# Altium PCB ISC.PcbDoc (part 1 of 3)
Units mm, origin at the board's own origin, x right, y up, seen from the top; angles counter-clockwise.
Board outline 152.4 x 101.6 mm, 2 copper layers (Top Layer, Bottom Layer); 689 components, 715 nets, 2378 pads, 0 vias.
Unrouted connection lines stored in the file: 1379.
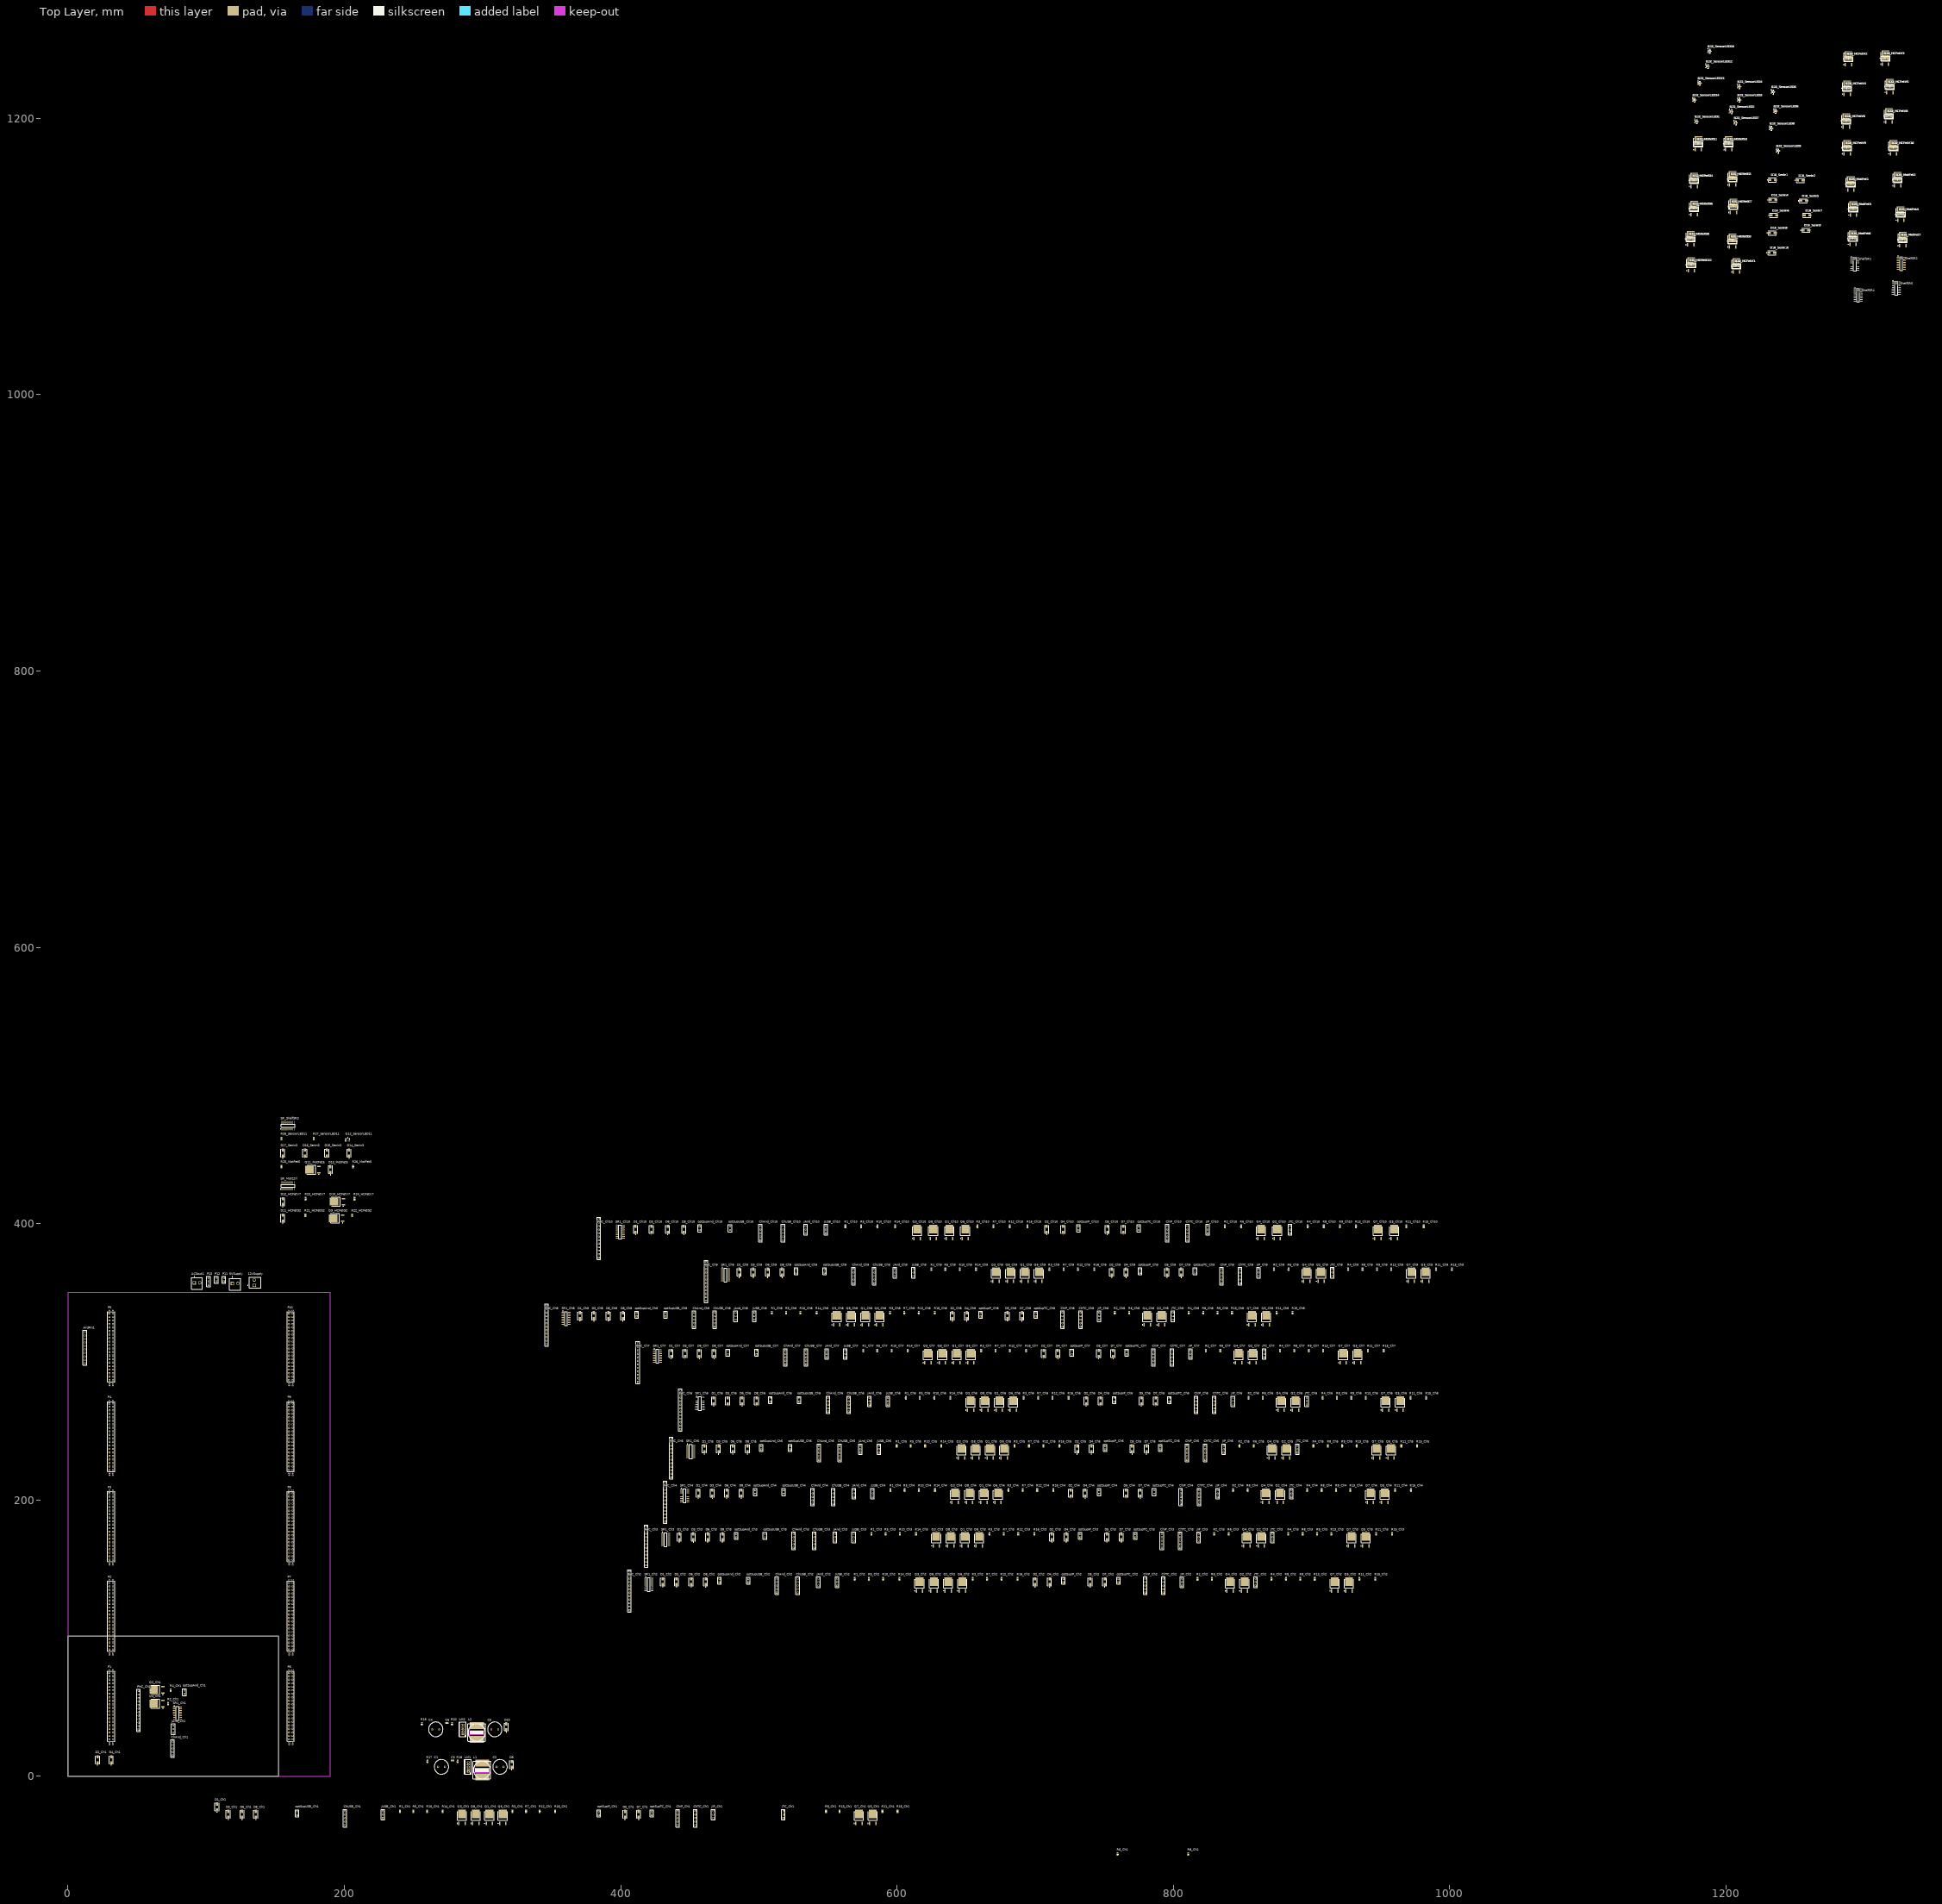
[diagram p0: Top Layer view]
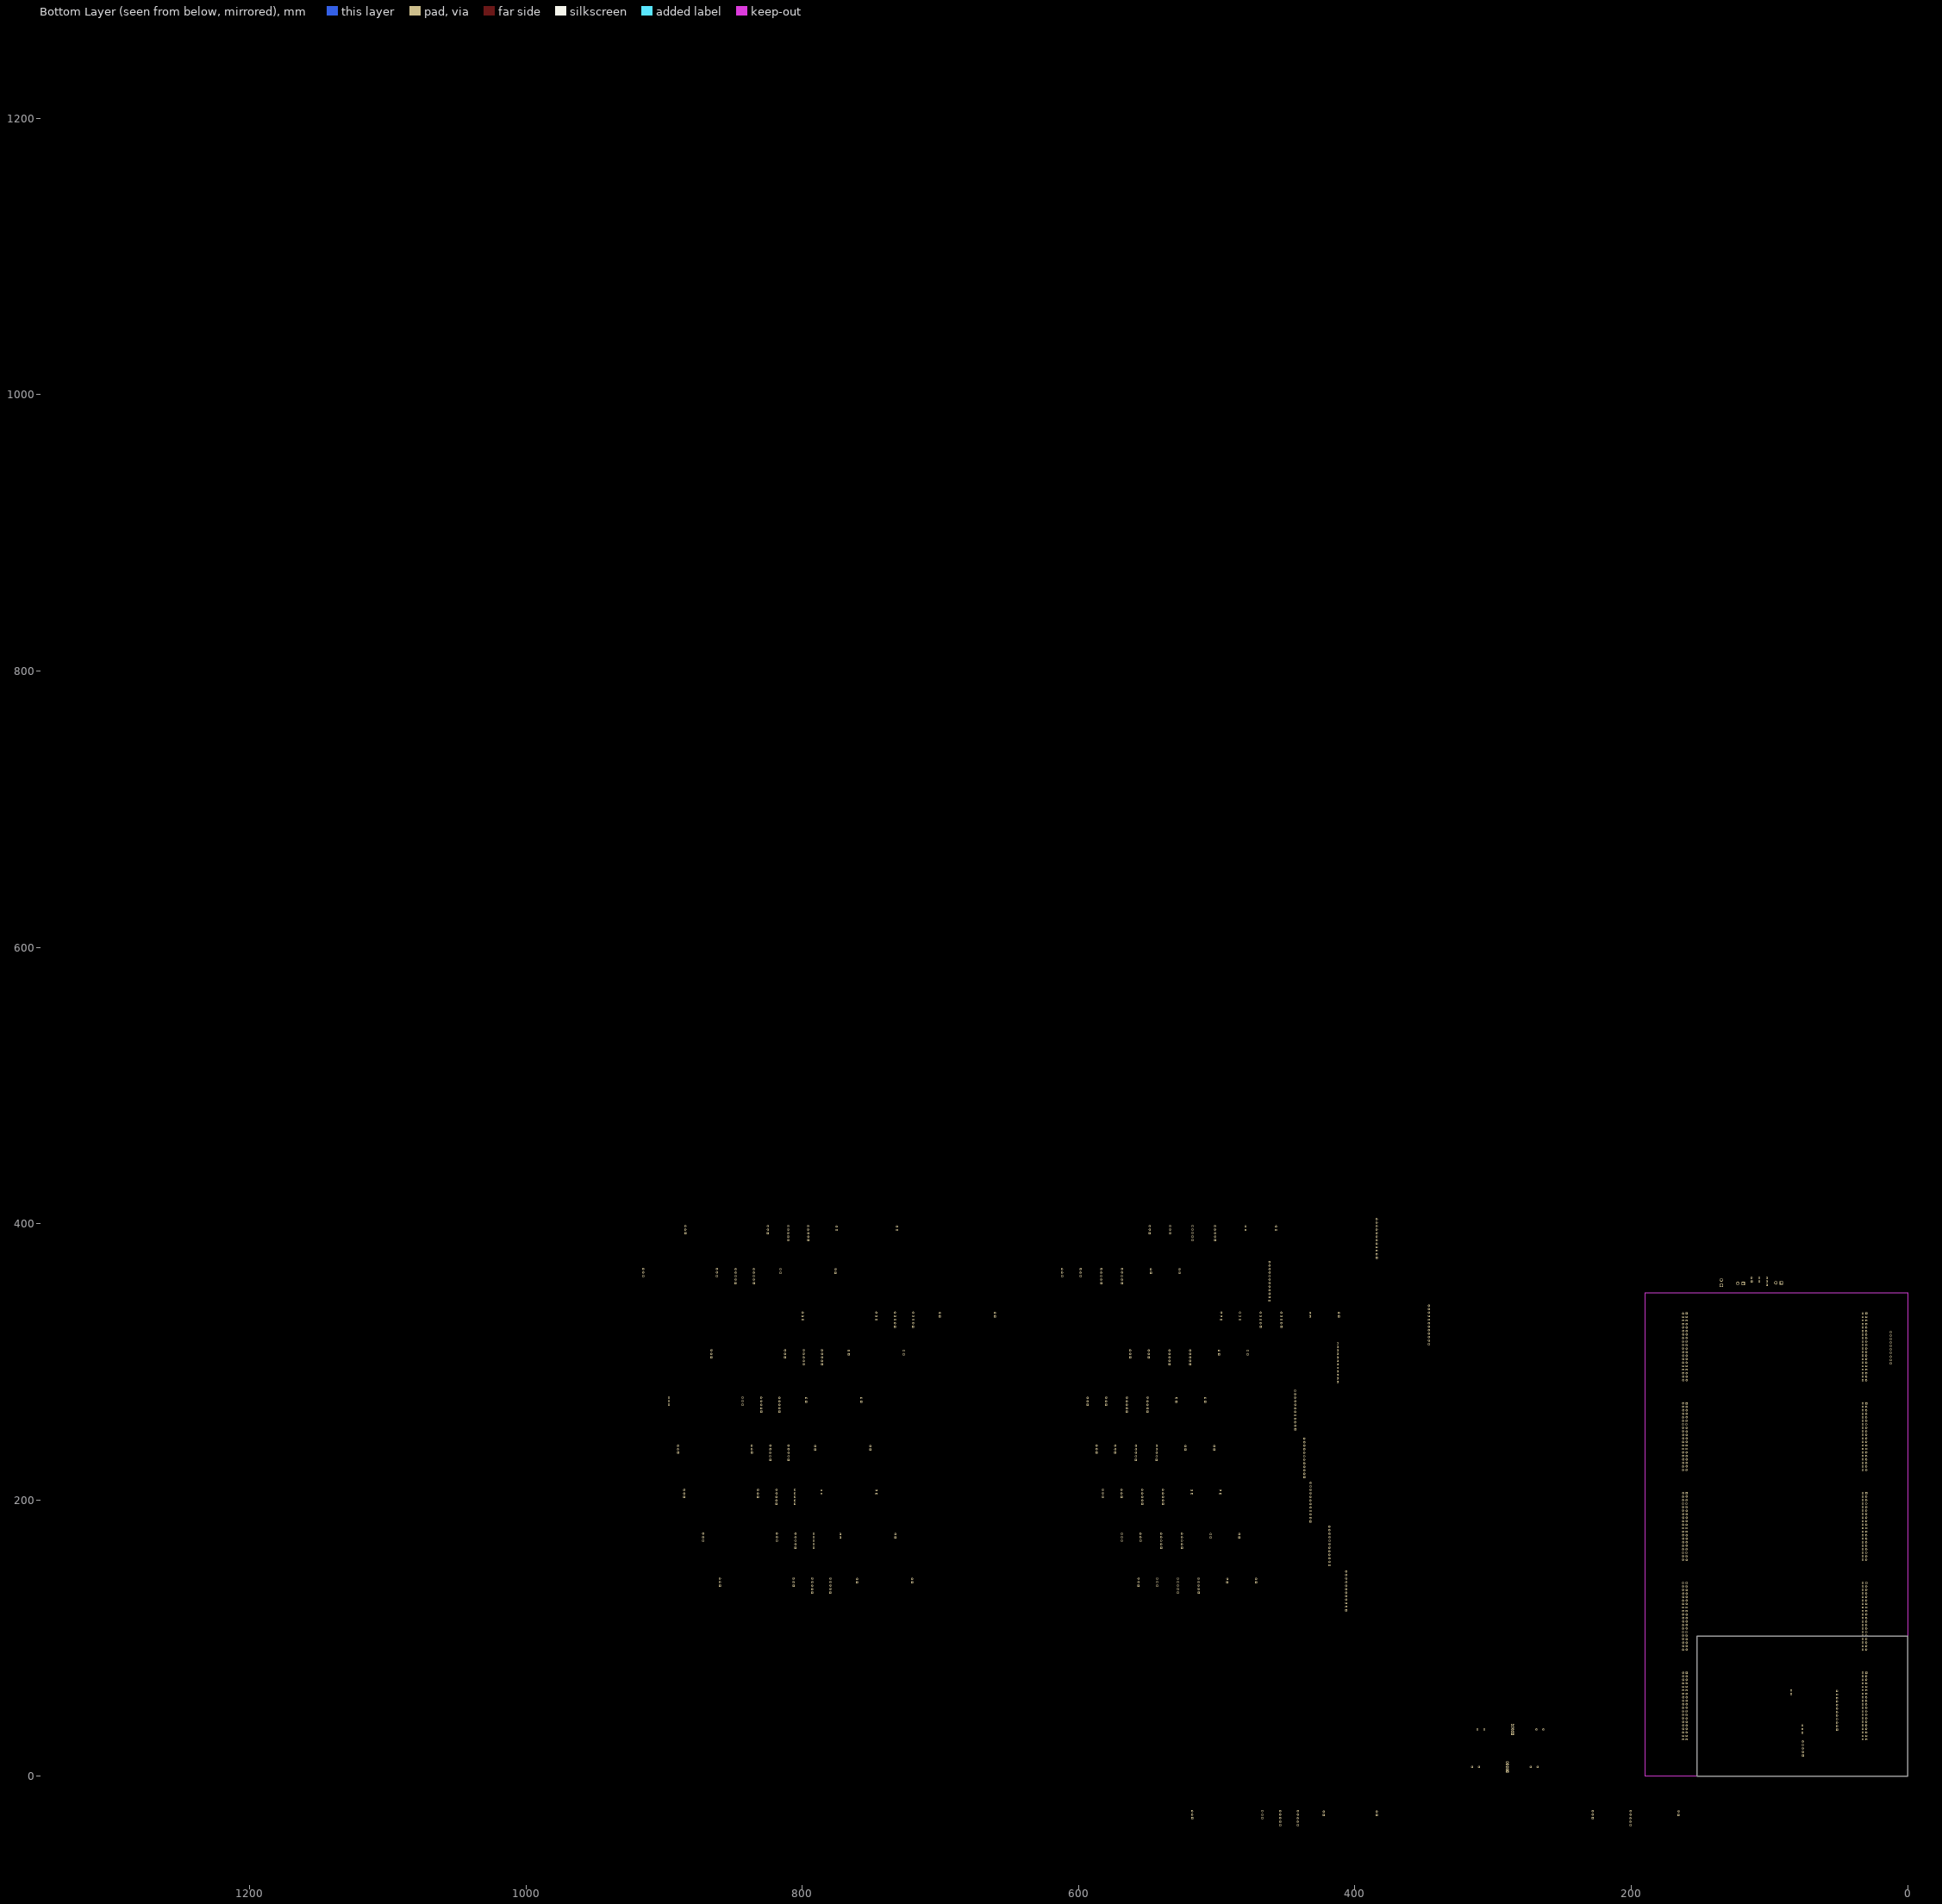
[diagram p1: Bottom Layer view, seen from below]

## Layer stack, top to bottom
Top Solder: solder mask 0.0102, Solder Resist, Dk 3.5
Top Layer: signal copper 0.0356
Dielectric 1: dielectric 0.32, FR-4, Dk 4.8
Bottom Layer: signal copper 0.0356
Bottom Solder: solder mask 0.0102, Solder Resist, Dk 3.5

## Board outline
0,0 152.4,0 152.4,101.6 0,101.6
cut-out: 0,0 190,0 190,350 0,350

## Design rules (kind name [scope] priority, off if disabled: settings)
Clearance [All] p1: gap=0.254 ignorepadtopadclearanceinfootprint=FALSE except(0: Arc-Hole Track-Hole SMDPad-Hole THPad-Hole Via-Hole Fill-Hole Poly-Hole Region-Hole Text-Hole)
PolygonConnect [All] p1: connectstyle=Relief reliefconductorwidth=0.254 reliefentries=4 polygonreliefangle="90 Angle" airgapwidth=0.254
RoomDefinition ShelfSR5 [InComponentClass('ShelfSR5')] p1: confinementstyle=ConfineIn formatcopy=TRUE lockcomponents=FALSE outline 1319.53,1071.753 1338.326,1071.753 1338.326,1082.802 1319.53,1082.802
RoomDefinition ShelfSR4 [InComponentClass('ShelfSR4')] p2: confinementstyle=ConfineIn formatcopy=TRUE lockcomponents=FALSE outline 1291.971,1066.8 1310.767,1066.8 1310.767,1077.849 1291.971,1077.849
RoomDefinition ShelfSR3 [InComponentClass('ShelfSR3')] p3: confinementstyle=ConfineIn formatcopy=TRUE lockcomponents=FALSE outline 153.543,467.233 170.18,467.233 170.18,477.393 153.543,477.393
RoomDefinition ShelfSR2 [InComponentClass('ShelfSR2')] p4: confinementstyle=ConfineIn formatcopy=TRUE lockcomponents=FALSE outline 1323.162,1089.673 1341.958,1089.673 1341.958,1100.722 1323.162,1100.722
RoomDefinition ShelfSR1 [InComponentClass('ShelfSR1')] p5: confinementstyle=ConfineIn formatcopy=TRUE lockcomponents=FALSE outline 1289.558,1089.279 1307.846,1089.279 1307.846,1100.328 1289.558,1100.328
RoomDefinition SensorLED14 [InComponentClass('SensorLED14')] p6: confinementstyle=ConfineIn formatcopy=TRUE lockcomponents=FALSE outline 1174.877,1211.199 1198.499,1211.199 1198.499,1217.803 1174.877,1217.803
RoomDefinition SensorLED13 [InComponentClass('SensorLED13')] p7: confinementstyle=ConfineIn formatcopy=TRUE lockcomponents=FALSE outline 1178.687,1223.391 1202.309,1223.391 1202.309,1229.995 1178.687,1229.995
RoomDefinition SensorLED12 [InComponentClass('SensorLED12')] p8: confinementstyle=ConfineIn formatcopy=TRUE lockcomponents=FALSE outline 1184.402,1235.583 1208.024,1235.583 1208.024,1242.187 1184.402,1242.187
RoomDefinition SensorLED11 [InComponentClass('SensorLED11')] p9: confinementstyle=ConfineIn formatcopy=TRUE lockcomponents=FALSE outline 153.543,458.978 222.504,458.978 222.504,466.09 153.543,466.09
RoomDefinition SensorLED10 [InComponentClass('SensorLED10')] p10: confinementstyle=ConfineIn formatcopy=TRUE lockcomponents=FALSE outline 1185.799,1246.632 1209.421,1246.632 1209.421,1253.236 1185.799,1253.236
RoomDefinition SensorLED9 [InComponentClass('SensorLED9')] p11: confinementstyle=ConfineIn formatcopy=TRUE lockcomponents=FALSE outline 1235.456,1174.369 1257.808,1174.369 1257.808,1180.973 1235.456,1180.973
RoomDefinition SensorLED8 [InComponentClass('SensorLED8')] p12: confinementstyle=ConfineIn formatcopy=TRUE lockcomponents=FALSE outline 1230.503,1190.752 1252.855,1190.752 1252.855,1197.356 1230.503,1197.356
RoomDefinition SensorLED7 [InComponentClass('SensorLED7')] p13: confinementstyle=ConfineIn formatcopy=TRUE lockcomponents=FALSE outline 1204.722,1194.689 1227.074,1194.689 1227.074,1201.293 1204.722,1201.293
RoomDefinition SensorLED6 [InComponentClass('SensorLED6')] p14: confinementstyle=ConfineIn formatcopy=TRUE lockcomponents=FALSE outline 1233.551,1203.198 1255.903,1203.198 1255.903,1209.802 1233.551,1209.802
RoomDefinition SensorLED5 [InComponentClass('SensorLED5')] p15: confinementstyle=ConfineIn formatcopy=TRUE lockcomponents=FALSE outline 1231.773,1217.041 1254.125,1217.041 1254.125,1223.645 1231.773,1223.645
RoomDefinition SensorLED4 [InComponentClass('SensorLED4')] p16: confinementstyle=ConfineIn formatcopy=TRUE lockcomponents=FALSE outline 1207.262,1220.978 1229.614,1220.978 1229.614,1227.582 1207.262,1227.582
RoomDefinition SensorLED3 [InComponentClass('SensorLED3')] p17: confinementstyle=ConfineIn formatcopy=TRUE lockcomponents=FALSE outline 1207.262,1211.326 1229.614,1211.326 1229.614,1217.93 1207.262,1217.93
RoomDefinition SensorLED2 [InComponentClass('SensorLED2')] p18: confinementstyle=ConfineIn formatcopy=TRUE lockcomponents=FALSE outline 1201.547,1202.944 1223.899,1202.944 1223.899,1209.548 1201.547,1209.548
RoomDefinition SensorLED1 [InComponentClass('SensorLED1')] p19: confinementstyle=ConfineIn formatcopy=TRUE lockcomponents=FALSE outline 1176.401,1195.705 1198.245,1195.705 1198.245,1202.309 1176.401,1202.309
RoomDefinition SenIn10 [InComponentClass('SenIn10')] p20: confinementstyle=ConfineIn formatcopy=TRUE lockcomponents=FALSE outline 1228.979,1100.836 1248.029,1100.836 1248.029,1107.313 1228.979,1107.313
RoomDefinition SenIn9 [InComponentClass('SenIn9')] p21: confinementstyle=ConfineIn formatcopy=TRUE lockcomponents=FALSE outline 1253.617,1117.092 1271.397,1117.092 1271.397,1123.569 1253.617,1123.569
RoomDefinition SenIn8 [InComponentClass('SenIn8')] p22: confinementstyle=ConfineIn formatcopy=TRUE lockcomponents=FALSE outline 1229.233,1115.187 1247.013,1115.187 1247.013,1121.664 1229.233,1121.664
RoomDefinition SenIn7 [InComponentClass('SenIn7')] p23: confinementstyle=ConfineIn formatcopy=TRUE lockcomponents=FALSE outline 1254.379,1127.887 1272.159,1127.887 1272.159,1134.364 1254.379,1134.364
RoomDefinition SenIn6 [InComponentClass('SenIn6')] p24: confinementstyle=ConfineIn formatcopy=TRUE lockcomponents=FALSE outline 1230.376,1127.887 1248.156,1127.887 1248.156,1134.364 1230.376,1134.364
RoomDefinition SenIn5 [InComponentClass('SenIn5')] p25: confinementstyle=ConfineIn formatcopy=TRUE lockcomponents=FALSE outline 1251.966,1138.428 1269.746,1138.428 1269.746,1144.905 1251.966,1144.905
RoomDefinition SenIn4 [InComponentClass('SenIn4')] p26: confinementstyle=ConfineIn formatcopy=TRUE lockcomponents=FALSE outline 1229.741,1139.063 1247.521,1139.063 1247.521,1145.54 1229.741,1145.54
RoomDefinition SenIn3 [InComponentClass('SenIn3')] p27: confinementstyle=ConfineIn formatcopy=TRUE lockcomponents=FALSE outline 153.543,446.913 216.662,446.913 216.662,457.708 153.543,457.708
RoomDefinition SenIn2 [InComponentClass('SenIn2')] p28: confinementstyle=ConfineIn formatcopy=TRUE lockcomponents=FALSE outline 1249.553,1153.16 1267.333,1153.16 1267.333,1159.637 1249.553,1159.637
RoomDefinition SenIn1 [InComponentClass('SenIn1')] p29: confinementstyle=ConfineIn formatcopy=TRUE lockcomponents=FALSE outline 1229.487,1153.541 1246.759,1153.541 1246.759,1160.018 1229.487,1160.018
RoomDefinition MotFet7 [InComponentClass('MotFet7')] p30: confinementstyle=ConfineIn formatcopy=TRUE lockcomponents=FALSE outline 1323.721,1106.043 1343.025,1106.043 1343.025,1118.235 1323.721,1118.235
RoomDefinition MotFet6 [InComponentClass('MotFet6')] p31: confinementstyle=ConfineIn formatcopy=TRUE lockcomponents=FALSE outline 1287.653,1106.932 1306.957,1106.932 1306.957,1119.124 1287.653,1119.124
RoomDefinition MotFet5 [InComponentClass('MotFet5')] p32: confinementstyle=ConfineIn formatcopy=TRUE lockcomponents=FALSE outline 153.543,434.975 221.996,434.975 221.996,445.77 153.543,445.77
RoomDefinition MotFet4 [InComponentClass('MotFet4')] p33: confinementstyle=ConfineIn formatcopy=TRUE lockcomponents=FALSE outline 1322.273,1124.471 1341.577,1124.471 1341.577,1136.663 1322.273,1136.663
RoomDefinition MotFet3 [InComponentClass('MotFet3')] p34: confinementstyle=ConfineIn formatcopy=TRUE lockcomponents=FALSE outline 1287.983,1128.281 1307.287,1128.281 1307.287,1140.473 1287.983,1140.473
RoomDefinition MotFet2 [InComponentClass('MotFet2')] p35: confinementstyle=ConfineIn formatcopy=TRUE lockcomponents=FALSE outline 1319.987,1149.49 1339.291,1149.49 1339.291,1161.682 1319.987,1161.682
RoomDefinition MotFet1 [InComponentClass('MotFet1')] p36: confinementstyle=ConfineIn formatcopy=TRUE lockcomponents=FALSE outline 1286.129,1146.429 1304.925,1146.429 1304.925,1158.621 1286.129,1158.621
RoomDefinition MotCtrl [InComponentClass('MotCtrl')] p37: confinementstyle=ConfineIn formatcopy=TRUE lockcomponents=FALSE outline 153.543,423.672 168.148,423.672 168.148,433.832 153.543,433.832
RoomDefinition ISC [InComponentClass('ISC')] p38: confinementstyle=ConfineIn formatcopy=TRUE lockcomponents=FALSE outline 12.4,348.1 143.337,348.1 143.337,364.824 12.4,364.824
RoomDefinition HCFetV10 [InComponentClass('HCFetV10')] p39: confinementstyle=ConfineIn formatcopy=TRUE lockcomponents=FALSE outline 1316.99,1172.591 1337.818,1172.591 1337.818,1184.783 1316.99,1184.783
RoomDefinition HCFetV9 [InComponentClass('HCFetV9')] p40: confinementstyle=ConfineIn formatcopy=TRUE lockcomponents=FALSE outline 1283.411,1172.604 1302.969,1172.604 1302.969,1184.796 1283.411,1184.796
RoomDefinition HCFetV8 [InComponentClass('HCFetV8')] p41: confinementstyle=ConfineIn formatcopy=TRUE lockcomponents=FALSE outline 1313.688,1195.578 1333.246,1195.578 1333.246,1207.77 1313.688,1207.77
RoomDefinition HCFetV7 [InComponentClass('HCFetV7')] p42: confinementstyle=ConfineIn formatcopy=TRUE lockcomponents=FALSE outline 153.543,411.734 223.266,411.734 223.266,422.529 153.543,422.529
RoomDefinition HCFetV6 [InComponentClass('HCFetV6')] p43: confinementstyle=ConfineIn formatcopy=TRUE lockcomponents=FALSE outline 1282.903,1192.035 1302.461,1192.035 1302.461,1204.227 1282.903,1204.227
RoomDefinition HCFetV5 [InComponentClass('HCFetV5')] p44: confinementstyle=ConfineIn formatcopy=TRUE lockcomponents=FALSE outline 1314.399,1216.927 1333.957,1216.927 1333.957,1229.119 1314.399,1229.119
RoomDefinition HCFetV4 [InComponentClass('HCFetV4')] p45: confinementstyle=ConfineIn formatcopy=TRUE lockcomponents=FALSE outline 1283.411,1215.657 1302.969,1215.657 1302.969,1227.849 1283.411,1227.849
RoomDefinition HCFetV3 [InComponentClass('HCFetV3')] p46: confinementstyle=ConfineIn formatcopy=TRUE lockcomponents=FALSE outline 1311.148,1237.361 1330.706,1237.361 1330.706,1249.553 1311.148,1249.553
RoomDefinition HCFetV2 [InComponentClass('HCFetV2')] p47: confinementstyle=ConfineIn formatcopy=TRUE lockcomponents=FALSE outline 1284.478,1236.98 1304.036,1236.98 1304.036,1249.172 1284.478,1249.172
RoomDefinition HCFetV1 [InComponentClass('HCFetV1')] p48: confinementstyle=ConfineIn formatcopy=TRUE lockcomponents=FALSE outline 1203.325,1086.993 1222.375,1086.993 1222.375,1099.185 1203.325,1099.185
RoomDefinition HCFetG10 [InComponentClass('HCFetG10')] p49: confinementstyle=ConfineIn formatcopy=TRUE lockcomponents=FALSE outline 1170.686,1087.882 1191.514,1087.882 1191.514,1100.074 1170.686,1100.074
RoomDefinition HCFetG9 [InComponentClass('HCFetG9')] p50: confinementstyle=ConfineIn formatcopy=TRUE lockcomponents=FALSE outline 1200.531,1105.027 1220.089,1105.027 1220.089,1117.219 1200.531,1117.219
RoomDefinition HCFetG8 [InComponentClass('HCFetG8')] p51: confinementstyle=ConfineIn formatcopy=TRUE lockcomponents=FALSE outline 1170.178,1106.678 1189.736,1106.678 1189.736,1118.87 1170.178,1118.87
RoomDefinition HCFetG7 [InComponentClass('HCFetG7')] p52: confinementstyle=ConfineIn formatcopy=TRUE lockcomponents=FALSE outline 1201.166,1130.046 1220.724,1130.046 1220.724,1142.238 1201.166,1142.238
RoomDefinition HCFetG6 [InComponentClass('HCFetG6')] p53: confinementstyle=ConfineIn formatcopy=TRUE lockcomponents=FALSE outline 1172.718,1128.649 1192.276,1128.649 1192.276,1140.841 1172.718,1140.841
RoomDefinition HCFetG5 [InComponentClass('HCFetG5')] p54: confinementstyle=ConfineIn formatcopy=TRUE lockcomponents=FALSE outline 1200.531,1149.985 1220.089,1149.985 1220.089,1162.177 1200.531,1162.177
RoomDefinition HCFetG4 [InComponentClass('HCFetG4')] p55: confinementstyle=ConfineIn formatcopy=TRUE lockcomponents=FALSE outline 1172.718,1148.969 1192.276,1148.969 1192.276,1161.161 1172.718,1161.161
RoomDefinition HCFetG3 [InComponentClass('HCFetG3')] p56: confinementstyle=ConfineIn formatcopy=TRUE lockcomponents=FALSE outline 1197.737,1175.512 1217.295,1175.512 1217.295,1187.704 1197.737,1187.704
RoomDefinition HCFetG2 [InComponentClass('HCFetG2')] p57: confinementstyle=ConfineIn formatcopy=TRUE lockcomponents=FALSE outline 153.543,399.796 221.488,399.796 221.488,410.591 153.543,410.591
RoomDefinition HCFetG1 [InComponentClass('HCFetG1')] p58: confinementstyle=ConfineIn formatcopy=TRUE lockcomponents=FALSE outline 1175.766,1175.512 1194.816,1175.512 1194.816,1187.704 1175.766,1187.704
RoomDefinition Ch10 [InComponentClass('Ch10')] p59: confinementstyle=ConfineIn formatcopy=TRUE lockcomponents=FALSE outline 382.803,373.842 992.276,373.842 992.276,402.544 382.803,402.544
RoomDefinition Ch9 [InComponentClass('Ch9')] p60: confinementstyle=ConfineIn formatcopy=TRUE lockcomponents=FALSE outline 460.269,342.776 1011.322,342.776 1011.322,371.478 460.269,371.478
RoomDefinition Ch8 [InComponentClass('Ch8')] p61: confinementstyle=ConfineIn formatcopy=TRUE lockcomponents=FALSE outline 344.934,311.243 895.987,311.243 895.987,339.945 344.934,339.945
RoomDefinition Ch7 [InComponentClass('Ch7')] p62: confinementstyle=ConfineIn formatcopy=TRUE lockcomponents=FALSE outline 410.948,283.943 962.001,283.943 962.001,312.645 410.948,312.645
RoomDefinition Ch6 [InComponentClass('Ch6')] p63: confinementstyle=ConfineIn formatcopy=TRUE lockcomponents=FALSE outline 441.748,249.643 992.801,249.643 992.801,278.345 441.748,278.345
RoomDefinition Ch5 [InComponentClass('Ch5')] p64: confinementstyle=ConfineIn formatcopy=TRUE lockcomponents=FALSE outline 435.151,214.928 986.204,214.928 986.204,243.63 435.151,243.63
RoomDefinition Ch4 [InComponentClass('Ch4')] p65: confinementstyle=ConfineIn formatcopy=TRUE lockcomponents=FALSE outline 430.648,182.943 981.701,182.943 981.701,211.645 430.648,211.645
RoomDefinition Ch3 [InComponentClass('Ch3')] p66: confinementstyle=ConfineIn formatcopy=TRUE lockcomponents=FALSE outline 416.948,151.243 968.001,151.243 968.001,179.945 416.948,179.945
RoomDefinition Ch2 [InComponentClass('Ch2')] p67: confinementstyle=ConfineIn formatcopy=TRUE lockcomponents=FALSE outline 404.834,118.743 955.887,118.743 955.887,147.445 404.834,147.445
RoomDefinition Ch1 [InComponentClass('Ch1')] p68: confinementstyle=ConfineIn formatcopy=TRUE lockcomponents=FALSE outline 81.853,-26.073 609.665,-26.073 609.665,2.629 81.853,2.629
RoomDefinition 3.3VReg [InComponentClass('3.3VReg')] p69: confinementstyle=ConfineIn formatcopy=TRUE lockcomponents=FALSE outline 255.056,23.876 320.08,23.876 320.08,42.164 255.056,42.164
RoomDefinition 2VReg [InComponentClass('2VReg')] p70: confinementstyle=ConfineIn formatcopy=TRUE lockcomponents=FALSE outline 259.12,-3.302 323.001,-3.302 323.001,14.986 259.12,14.986
RoutingVias [All] p1: holewidth=0.711 width=1.27 viastyle="Through Hole" minholewidth=0.711 minwidth=1.27 maxholewidth=0.711 maxwidth=1.27
SolderMaskExpansion [All] p1: expansion=0.102
Width [All] p1: maxlimit=0.254 minlimit=0.254 preferedwidth=0.254
30 further rules are at their usual default settings.

## Classes and differential pairs
channel class ShiftRegister: MotCtrl ShelfSR1 ShelfSR2 ShelfSR3 ShelfSR4 ShelfSR5
channel class SensorIn: SenIn1 SenIn2 SenIn3 SenIn4 SenIn5 SenIn6 SenIn7 SenIn8 SenIn9 SenIn10
channel class SenLEDFet: SensorLED1 SensorLED2 SensorLED3 SensorLED4 SensorLED5 SensorLED6 SensorLED7 SensorLED8 SensorLED9 SensorLED10 SensorLED11 SensorLED12 SensorLED13 SensorLED14
channel class MotorMosfet: MotFet1 MotFet2 MotFet3 MotFet4 MotFet5 MotFet6 MotFet7
channel class HighCurrentFetVcc: HCFetV1 HCFetV2 HCFetV3 HCFetV4 HCFetV5 HCFetV6 HCFetV7 HCFetV8 HCFetV9 HCFetV10
channel class HighCurrentFetGND: HCFetG1 HCFetG2 HCFetG3 HCFetG4 HCFetG5 HCFetG6 HCFetG7 HCFetG8 HCFetG9 HCFetG10
channel class ChargerControl: Ch1 Ch2 Ch3 Ch4 Ch5 Ch6 Ch7 Ch8 Ch9 Ch10
component class ShelfSR5: SR_ShelfSR5
component class ShelfSR4: SR_ShelfSR4
component class ShelfSR3: SR_ShelfSR3
component class ShelfSR2: SR_ShelfSR2
component class ShelfSR1: SR_ShelfSR1
component class SensorLED14: Q12_SensorLED14 R27_SensorLED14 R28_SensorLED14
component class SensorLED13: Q12_SensorLED13 R27_SensorLED13 R28_SensorLED13
component class SensorLED12: Q12_SensorLED12 R27_SensorLED12 R28_SensorLED12
component class SensorLED11: Q12_SensorLED11 R27_SensorLED11 R28_SensorLED11
component class SensorLED10: Q12_SensorLED10 R27_SensorLED10 R28_SensorLED10
component class SensorLED9: Q12_SensorLED9 R27_SensorLED9 R28_SensorLED9
component class SensorLED8: Q12_SensorLED8 R27_SensorLED8 R28_SensorLED8
component class SensorLED7: Q12_SensorLED7 R27_SensorLED7 R28_SensorLED7
component class SensorLED6: Q12_SensorLED6 R27_SensorLED6 R28_SensorLED6
component class SensorLED5: Q12_SensorLED5 R27_SensorLED5 R28_SensorLED5
component class SensorLED4: Q12_SensorLED4 R27_SensorLED4 R28_SensorLED4
component class SensorLED3: Q12_SensorLED3 R27_SensorLED3 R28_SensorLED3
component class SensorLED2: Q12_SensorLED2 R27_SensorLED2 R28_SensorLED2
component class SensorLED1: Q12_SensorLED1 R27_SensorLED1 R28_SensorLED1
component class SenIn10: D14_SenIn10 D15_SenIn10 D16_SenIn10 D17_SenIn10
component class SenIn9: D14_SenIn9 D15_SenIn9 D16_SenIn9 D17_SenIn9
component class SenIn8: D14_SenIn8 D15_SenIn8 D16_SenIn8 D17_SenIn8
component class SenIn7: D14_SenIn7 D15_SenIn7 D16_SenIn7 D17_SenIn7
component class SenIn6: D14_SenIn6 D15_SenIn6 D16_SenIn6 D17_SenIn6
component class SenIn5: D14_SenIn5 D15_SenIn5 D16_SenIn5 D17_SenIn5
component class SenIn4: D14_SenIn4 D15_SenIn4 D16_SenIn4 D17_SenIn4
component class SenIn3: D14_SenIn3 D15_SenIn3 D16_SenIn3 D17_SenIn3
component class SenIn2: D14_SenIn2 D15_SenIn2 D16_SenIn2 D17_SenIn2
component class SenIn1: D14_SenIn1 D15_SenIn1 D16_SenIn1 D17_SenIn1
component class MotFet7: D13_MotFet7 Q11_MotFet7 R25_MotFet7 R26_MotFet7
component class MotFet6: D13_MotFet6 Q11_MotFet6 R25_MotFet6 R26_MotFet6
component class MotFet5: D13_MotFet5 Q11_MotFet5 R25_MotFet5 R26_MotFet5
component class MotFet4: D13_MotFet4 Q11_MotFet4 R25_MotFet4 R26_MotFet4
component class MotFet3: D13_MotFet3 Q11_MotFet3 R25_MotFet3 R26_MotFet3
component class MotFet2: D13_MotFet2 Q11_MotFet2 R25_MotFet2 R26_MotFet2
component class MotFet1: D13_MotFet1 Q11_MotFet1 R25_MotFet1 R26_MotFet1
component class MotCtrl: SR_MotCtrl
component class ISC: 5VSupply 12VSupply ACSout1 ArdPin1 P1 P2 P3 P4 P5 P6 P7 P8 P9 P10 P11 P12 P13
component class HCFetV10: D12_HCFetV10 Q10_HCFetV10 R23_HCFetV10 R24_HCFetV10
component class HCFetV9: D12_HCFetV9 Q10_HCFetV9 R23_HCFetV9 R24_HCFetV9
component class HCFetV8: D12_HCFetV8 Q10_HCFetV8 R23_HCFetV8 R24_HCFetV8
component class HCFetV7: D12_HCFetV7 Q10_HCFetV7 R23_HCFetV7 R24_HCFetV7
component class HCFetV6: D12_HCFetV6 Q10_HCFetV6 R23_HCFetV6 R24_HCFetV6
component class HCFetV5: D12_HCFetV5 Q10_HCFetV5 R23_HCFetV5 R24_HCFetV5
component class HCFetV4: D12_HCFetV4 Q10_HCFetV4 R23_HCFetV4 R24_HCFetV4
component class HCFetV3: D12_HCFetV3 Q10_HCFetV3 R23_HCFetV3 R24_HCFetV3
component class HCFetV2: D12_HCFetV2 Q10_HCFetV2 R23_HCFetV2 R24_HCFetV2
component class HCFetV1: D12_HCFetV1 Q10_HCFetV1 R23_HCFetV1 R24_HCFetV1
component class HCFetG10: D11_HCFetG10 Q9_HCFetG10 R21_HCFetG10 R22_HCFetG10
component class HCFetG9: D11_HCFetG9 Q9_HCFetG9 R21_HCFetG9 R22_HCFetG9
component class HCFetG8: D11_HCFetG8 Q9_HCFetG8 R21_HCFetG8 R22_HCFetG8
component class HCFetG7: D11_HCFetG7 Q9_HCFetG7 R21_HCFetG7 R22_HCFetG7
component class HCFetG6: D11_HCFetG6 Q9_HCFetG6 R21_HCFetG6 R22_HCFetG6
component class HCFetG5: D11_HCFetG5 Q9_HCFetG5 R21_HCFetG5 R22_HCFetG5
component class HCFetG4: D11_HCFetG4 Q9_HCFetG4 R21_HCFetG4 R22_HCFetG4
component class HCFetG3: D11_HCFetG3 Q9_HCFetG3 R21_HCFetG3 R22_HCFetG3
component class HCFetG2: D11_HCFetG2 Q9_HCFetG2 R21_HCFetG2 R22_HCFetG2
component class HCFetG1: D11_HCFetG1 Q9_HCFetG1 R21_HCFetG1 R22_HCFetG1
component class Ch10: ChAnd_Ch10 ChIP_Ch10 ChTC_Ch10 ChUSB_Ch10 D1_Ch10 D2_Ch10 D3_Ch10 D4_Ch10 D5_Ch10 D6_Ch10 D7_Ch10 D8_Ch10 JAnd_Ch10 JIP_Ch10 JTC_Ch10 JUSB_Ch10 optSupAnd_Ch10 optSupIP_Ch10 optSupTC_Ch10 optSupUSB_Ch10 PHC_Ch10 Q1_Ch10 Q2_Ch10 Q3_Ch10 Q4_Ch10 Q5_Ch10 Q6_Ch10 Q7_Ch10 Q8_Ch10 R1_Ch10 R2_Ch10 R3_Ch10 R4_Ch10 R5_Ch10 R6_Ch10 R7_Ch10 R8_Ch10 R9_Ch10 R10_Ch10 R11_Ch10 R12_Ch10 R13_Ch10 R14_Ch10 R15_Ch10 R16_Ch10 SR1_Ch10
component class Ch9: ChAnd_Ch9 ChIP_Ch9 ChTC_Ch9 ChUSB_Ch9 D1_Ch9 D2_Ch9 D3_Ch9 D4_Ch9 D5_Ch9 D6_Ch9 D7_Ch9 D8_Ch9 JAnd_Ch9 JIP_Ch9 JTC_Ch9 JUSB_Ch9 optSupAnd_Ch9 optSupIP_Ch9 optSupTC_Ch9 optSupUSB_Ch9 PHC_Ch9 Q1_Ch9 Q2_Ch9 Q3_Ch9 Q4_Ch9 Q5_Ch9 Q6_Ch9 Q7_Ch9 Q8_Ch9 R1_Ch9 R2_Ch9 R3_Ch9 R4_Ch9 R5_Ch9 R6_Ch9 R7_Ch9 R8_Ch9 R9_Ch9 R10_Ch9 R11_Ch9 R12_Ch9 R13_Ch9 R14_Ch9 R15_Ch9 R16_Ch9 SR1_Ch9
component class Ch8: ChAnd_Ch8 ChIP_Ch8 ChTC_Ch8 ChUSB_Ch8 D1_Ch8 D2_Ch8 D3_Ch8 D4_Ch8 D5_Ch8 D6_Ch8 D7_Ch8 D8_Ch8 JAnd_Ch8 JIP_Ch8 JTC_Ch8 JUSB_Ch8 optSupAnd_Ch8 optSupIP_Ch8 optSupTC_Ch8 optSupUSB_Ch8 PHC_Ch8 Q1_Ch8 Q2_Ch8 Q3_Ch8 Q4_Ch8 Q5_Ch8 Q6_Ch8 Q7_Ch8 Q8_Ch8 R1_Ch8 R2_Ch8 R3_Ch8 R4_Ch8 R5_Ch8 R6_Ch8 R7_Ch8 R8_Ch8 R9_Ch8 R10_Ch8 R11_Ch8 R12_Ch8 R13_Ch8 R14_Ch8 R15_Ch8 R16_Ch8 SR1_Ch8
component class Ch7: ChAnd_Ch7 ChIP_Ch7 ChTC_Ch7 ChUSB_Ch7 D1_Ch7 D2_Ch7 D3_Ch7 D4_Ch7 D5_Ch7 D6_Ch7 D7_Ch7 D8_Ch7 JAnd_Ch7 JIP_Ch7 JTC_Ch7 JUSB_Ch7 optSupAnd_Ch7 optSupIP_Ch7 optSupTC_Ch7 optSupUSB_Ch7 PHC_Ch7 Q1_Ch7 Q2_Ch7 Q3_Ch7 Q4_Ch7 Q5_Ch7 Q6_Ch7 Q7_Ch7 Q8_Ch7 R1_Ch7 R2_Ch7 R3_Ch7 R4_Ch7 R5_Ch7 R6_Ch7 R7_Ch7 R8_Ch7 R9_Ch7 R10_Ch7 R11_Ch7 R12_Ch7 R13_Ch7 R14_Ch7 R15_Ch7 R16_Ch7 SR1_Ch7
component class Ch6: ChAnd_Ch6 ChIP_Ch6 ChTC_Ch6 ChUSB_Ch6 D1_Ch6 D2_Ch6 D3_Ch6 D4_Ch6 D5_Ch6 D6_Ch6 D7_Ch6 D8_Ch6 JAnd_Ch6 JIP_Ch6 JTC_Ch6 JUSB_Ch6 optSupAnd_Ch6 optSupIP_Ch6 optSupTC_Ch6 optSupUSB_Ch6 PHC_Ch6 Q1_Ch6 Q2_Ch6 Q3_Ch6 Q4_Ch6 Q5_Ch6 Q6_Ch6 Q7_Ch6 Q8_Ch6 R1_Ch6 R2_Ch6 R3_Ch6 R4_Ch6 R5_Ch6 R6_Ch6 R7_Ch6 R8_Ch6 R9_Ch6 R10_Ch6 R11_Ch6 R12_Ch6 R13_Ch6 R14_Ch6 R15_Ch6 R16_Ch6 SR1_Ch6
component class Ch5: ChAnd_Ch5 ChIP_Ch5 ChTC_Ch5 ChUSB_Ch5 D1_Ch5 D2_Ch5 D3_Ch5 D4_Ch5 D5_Ch5 D6_Ch5 D7_Ch5 D8_Ch5 JAnd_Ch5 JIP_Ch5 JTC_Ch5 JUSB_Ch5 optSupAnd_Ch5 optSupIP_Ch5 optSupTC_Ch5 optSupUSB_Ch5 PHC_Ch5 Q1_Ch5 Q2_Ch5 Q3_Ch5 Q4_Ch5 Q5_Ch5 Q6_Ch5 Q7_Ch5 Q8_Ch5 R1_Ch5 R2_Ch5 R3_Ch5 R4_Ch5 R5_Ch5 R6_Ch5 R7_Ch5 R8_Ch5 R9_Ch5 R10_Ch5 R11_Ch5 R12_Ch5 R13_Ch5 R14_Ch5 R15_Ch5 R16_Ch5 SR1_Ch5
component class Ch4: ChAnd_Ch4 ChIP_Ch4 ChTC_Ch4 ChUSB_Ch4 D1_Ch4 D2_Ch4 D3_Ch4 D4_Ch4 D5_Ch4 D6_Ch4 D7_Ch4 D8_Ch4 JAnd_Ch4 JIP_Ch4 JTC_Ch4 JUSB_Ch4 optSupAnd_Ch4 optSupIP_Ch4 optSupTC_Ch4 optSupUSB_Ch4 PHC_Ch4 Q1_Ch4 Q2_Ch4 Q3_Ch4 Q4_Ch4 Q5_Ch4 Q6_Ch4 Q7_Ch4 Q8_Ch4 R1_Ch4 R2_Ch4 R3_Ch4 R4_Ch4 R5_Ch4 R6_Ch4 R7_Ch4 R8_Ch4 R9_Ch4 R10_Ch4 R11_Ch4 R12_Ch4 R13_Ch4 R14_Ch4 R15_Ch4 R16_Ch4 SR1_Ch4
component class Ch3: ChAnd_Ch3 ChIP_Ch3 ChTC_Ch3 ChUSB_Ch3 D1_Ch3 D2_Ch3 D3_Ch3 D4_Ch3 D5_Ch3 D6_Ch3 D7_Ch3 D8_Ch3 JAnd_Ch3 JIP_Ch3 JTC_Ch3 JUSB_Ch3 optSupAnd_Ch3 optSupIP_Ch3 optSupTC_Ch3 optSupUSB_Ch3 PHC_Ch3 Q1_Ch3 Q2_Ch3 Q3_Ch3 Q4_Ch3 Q5_Ch3 Q6_Ch3 Q7_Ch3 Q8_Ch3 R1_Ch3 R2_Ch3 R3_Ch3 R4_Ch3 R5_Ch3 R6_Ch3 R7_Ch3 R8_Ch3 R9_Ch3 R10_Ch3 R11_Ch3 R12_Ch3 R13_Ch3 R14_Ch3 R15_Ch3 R16_Ch3 SR1_Ch3
component class Ch2: ChAnd_Ch2 ChIP_Ch2 ChTC_Ch2 ChUSB_Ch2 D1_Ch2 D2_Ch2 D3_Ch2 D4_Ch2 D5_Ch2 D6_Ch2 D7_Ch2 D8_Ch2 JAnd_Ch2 JIP_Ch2 JTC_Ch2 JUSB_Ch2 optSupAnd_Ch2 optSupIP_Ch2 optSupTC_Ch2 optSupUSB_Ch2 PHC_Ch2 Q1_Ch2 Q2_Ch2 Q3_Ch2 Q4_Ch2 Q5_Ch2 Q6_Ch2 Q7_Ch2 Q8_Ch2 R1_Ch2 R2_Ch2 R3_Ch2 R4_Ch2 R5_Ch2 R6_Ch2 R7_Ch2 R8_Ch2 R9_Ch2 R10_Ch2 R11_Ch2 R12_Ch2 R13_Ch2 R14_Ch2 R15_Ch2 R16_Ch2 SR1_Ch2
component class Ch1: ChAnd_Ch1 ChIP_Ch1 ChTC_Ch1 ChUSB_Ch1 D1_Ch1 D2_Ch1 D3_Ch1 D4_Ch1 D5_Ch1 D6_Ch1 D7_Ch1 D8_Ch1 JAnd_Ch1 JIP_Ch1 JTC_Ch1 JUSB_Ch1 optSupAnd_Ch1 optSupIP_Ch1 optSupTC_Ch1 optSupUSB_Ch1 PHC_Ch1 Q1_Ch1 Q2_Ch1 Q3_Ch1 Q4_Ch1 Q5_Ch1 Q6_Ch1 Q7_Ch1 Q8_Ch1 R1_Ch1 R2_Ch1 R3_Ch1 R4_Ch1 R5_Ch1 R6_Ch1 R7_Ch1 R8_Ch1 R9_Ch1 R10_Ch1 R11_Ch1 R12_Ch1 R13_Ch1 R14_Ch1 R15_Ch1 R16_Ch1 SR1_Ch1
component class 3.3VReg: C4 C5 C6 D10 L2 LM2 R19 R20
component class 2VReg: C1 C2 C3 D9 L1 LM1 R17 R18

## Components (designator, comment, footprint, x,y, rotation, side; value= is the part's Value field where it differs from the comment)
5VSupply "6-1123723-2" *TE_6-1123723-2 120.985,356.696 r0 top
12VSupply "6-1123723-2" *TE_6-1123723-2 134.828,357.331 r90 top
ACSout1 "ACS712Measure" *TE_6-1123723-2 93.426,357.204 r0 top
ArdPin1 "Header 10" HDR1X10 12.275,298.8 r90 top
C1 "100uf" RB5-10.5 270.296,6.858 r0 top
C2 "470uF" RB5-10.5 312.714,6.858 r0 top
C3 "40nf" 6-0805_L 278.424,11.43 r0 top
C4 "100uf" RB5-10.5 266.232,34.036 r0 top
C5 "470uF" RB5-10.5 308.904,34.036 r0 top
C6 "40nf" 6-0805_L 274.36,38.608 r0 top
ChAnd_Ch1 "Header 5" HDR1X5 75.8,15.1 r90 top (schematic designator ChAnd)
ChAnd_Ch2 "Header 5" HDR1X5 513.165,132.967 r90 top (schematic designator ChAnd)
ChAnd_Ch3 "Header 5" HDR1X5 525.279,165.467 r90 top (schematic designator ChAnd)
ChAnd_Ch4 "Header 5" HDR1X5 538.979,197.167 r90 top (schematic designator ChAnd)
ChAnd_Ch5 "Header 5" HDR1X5 543.482,229.152 r90 top (schematic designator ChAnd)
ChAnd_Ch6 "Header 5" HDR1X5 550.079,263.867 r90 top (schematic designator ChAnd)
ChAnd_Ch7 "Header 5" HDR1X5 519.279,298.167 r90 top (schematic designator ChAnd)
ChAnd_Ch8 "Header 5" HDR1X5 453.265,325.467 r90 top (schematic designator ChAnd)
ChAnd_Ch9 "Header 5" HDR1X5 568.6,357 r90 top (schematic designator ChAnd)
ChAnd_Ch10 "Header 5" HDR1X5 501.294,388.066 r90 top (schematic designator ChAnd)
ChIP_Ch1 "Header 5" HDR1X5 441.39,-35.306 r90 top (schematic designator ChIP)
ChIP_Ch2 "Header 5" HDR1X5 779.611,132.967 r90 top (schematic designator ChIP)
ChIP_Ch3 "Header 5" HDR1X5 791.725,165.467 r90 top (schematic designator ChIP)
ChIP_Ch4 "Header 5" HDR1X5 805.425,197.167 r90 top (schematic designator ChIP)
ChIP_Ch5 "Header 5" HDR1X5 809.928,229.152 r90 top (schematic designator ChIP)
ChIP_Ch6 "Header 5" HDR1X5 816.525,263.867 r90 top (schematic designator ChIP)
ChIP_Ch7 "Header 5" HDR1X5 785.725,298.167 r90 top (schematic designator ChIP)
ChIP_Ch8 "Header 5" HDR1X5 719.711,325.467 r90 top (schematic designator ChIP)
ChIP_Ch9 "Header 5" HDR1X5 835.046,357 r90 top (schematic designator ChIP)
ChIP_Ch10 "Header 5" HDR1X5 795.68,388.066 r90 top (schematic designator ChIP)
ChTC_Ch1 "Header 5" HDR1X5 454.09,-35.306 r90 top (schematic designator ChTC)
ChTC_Ch2 "Header 5" HDR1X5 792.819,132.967 r90 top (schematic designator ChTC)
ChTC_Ch3 "Header 5" HDR1X5 804.933,165.467 r90 top (schematic designator ChTC)
ChTC_Ch4 "Header 5" HDR1X5 818.633,197.167 r90 top (schematic designator ChTC)
ChTC_Ch5 "Header 5" HDR1X5 823.136,229.152 r90 top (schematic designator ChTC)
ChTC_Ch6 "Header 5" HDR1X5 829.733,263.867 r90 top (schematic designator ChTC)
ChTC_Ch7 "Header 5" HDR1X5 798.933,298.167 r90 top (schematic designator ChTC)
ChTC_Ch8 "Header 5" HDR1X5 732.919,325.467 r90 top (schematic designator ChTC)
ChTC_Ch9 "Header 5" HDR1X5 848.254,357 r90 top (schematic designator ChTC)
ChTC_Ch10 "Header 5" HDR1X5 810.158,388.066 r90 top (schematic designator ChTC)
ChUSB_Ch1 "Header 5" HDR1X5 200.598,-35.306 r90 top (schematic designator ChUSB)
ChUSB_Ch2 "Header 5" HDR1X5 528.151,132.967 r90 top (schematic designator ChUSB)
ChUSB_Ch3 "Header 5" HDR1X5 540.265,165.467 r90 top (schematic designator ChUSB)
ChUSB_Ch4 "Header 5" HDR1X5 553.965,197.167 r90 top (schematic designator ChUSB)
ChUSB_Ch5 "Header 5" HDR1X5 558.468,229.152 r90 top (schematic designator ChUSB)
ChUSB_Ch6 "Header 5" HDR1X5 565.065,263.867 r90 top (schematic designator ChUSB)
ChUSB_Ch7 "Header 5" HDR1X5 534.265,298.167 r90 top (schematic designator ChUSB)
ChUSB_Ch8 "Header 5" HDR1X5 468.251,325.467 r90 top (schematic designator ChUSB)
ChUSB_Ch9 "Header 5" HDR1X5 583.586,357 r90 top (schematic designator ChUSB)
ChUSB_Ch10 "Header 5" HDR1X5 517.55,388.066 r90 top (schematic designator ChUSB)
D1_Ch1 "SM330A" *DIOM5227X270N_S1M(Primary) 107.916,-22.118 r90 top (schematic designator D1)
D1_Ch2 "SM330A" *DIOM5227X270N_S1M(Primary) 430.361,140.841 r90 top (schematic designator D1)
D1_Ch3 "SM330A" *DIOM5227X270N_S1M(Primary) 442.475,173.341 r90 top (schematic designator D1)
D1_Ch4 "SM330A" *DIOM5227X270N_S1M(Primary) 456.175,205.041 r90 top (schematic designator D1)
D1_Ch5 "SM330A" *DIOM5227X270N_S1M(Primary) 460.678,237.026 r90 top (schematic designator D1)
D1_Ch6 "SM330A" *DIOM5227X270N_S1M(Primary) 467.275,271.741 r90 top (schematic designator D1)
D1_Ch7 "SM330A" *DIOM5227X270N_S1M(Primary) 436.475,306.041 r90 top (schematic designator D1)
D1_Ch8 "SM330A" *DIOM5227X270N_S1M(Primary) 370.461,333.341 r90 top (schematic designator D1)
D1_Ch9 "SM330A" *DIOM5227X270N_S1M(Primary) 485.796,364.874 r90 top (schematic designator D1)
D1_Ch10 "SM330A" *DIOM5227X270N_S1M(Primary) 410.87,395.94 r90 top (schematic designator D1)
D2_Ch1 "SM330A" *DIOM5227X270N_S1M(Primary) 21.409,11.968 r90 top (schematic designator D2)
D2_Ch2 "SM330A" *DIOM5227X270N_S1M(Primary) 699.982,140.841 r90 top (schematic designator D2)
D2_Ch3 "SM330A" *DIOM5227X270N_S1M(Primary) 712.096,173.341 r90 top (schematic designator D2)
D2_Ch4 "SM330A" *DIOM5227X270N_S1M(Primary) 725.796,205.041 r90 top (schematic designator D2)
D2_Ch5 "SM330A" *DIOM5227X270N_S1M(Primary) 730.299,237.026 r90 top (schematic designator D2)
D2_Ch6 "SM330A" *DIOM5227X270N_S1M(Primary) 736.896,271.741 r90 top (schematic designator D2)
D2_Ch7 "SM330A" *DIOM5227X270N_S1M(Primary) 706.096,306.041 r90 top (schematic designator D2)
D2_Ch8 "SM330A" *DIOM5227X270N_S1M(Primary) 640.082,333.341 r90 top (schematic designator D2)
D2_Ch9 "SM330A" *DIOM5227X270N_S1M(Primary) 755.417,364.874 r90 top (schematic designator D2)
D2_Ch10 "SM330A" *DIOM5227X270N_S1M(Primary) 708.431,395.94 r90 top (schematic designator D2)
D3_Ch1 "SM330A" *DIOM5227X270N_S1M(Primary) 116.016,-27.432 r90 top (schematic designator D3)
D3_Ch2 "SM330A" *DIOM5227X270N_S1M(Primary) 440.521,140.841 r90 top (schematic designator D3)
D3_Ch3 "SM330A" *DIOM5227X270N_S1M(Primary) 452.635,173.341 r90 top (schematic designator D3)
D3_Ch4 "SM330A" *DIOM5227X270N_S1M(Primary) 466.335,205.041 r90 top (schematic designator D3)
D3_Ch5 "SM330A" *DIOM5227X270N_S1M(Primary) 470.838,237.026 r90 top (schematic designator D3)
D3_Ch6 "SM330A" *DIOM5227X270N_S1M(Primary) 477.435,271.741 r90 top (schematic designator D3)
D3_Ch7 "SM330A" *DIOM5227X270N_S1M(Primary) 446.635,306.041 r90 top (schematic designator D3)
D3_Ch8 "SM330A" *DIOM5227X270N_S1M(Primary) 380.621,333.341 r90 top (schematic designator D3)
D3_Ch9 "SM330A" *DIOM5227X270N_S1M(Primary) 495.956,364.874 r90 top (schematic designator D3)
D3_Ch10 "SM330A" *DIOM5227X270N_S1M(Primary) 422.3,395.94 r90 top (schematic designator D3)
D4_Ch1 "SM330A" *DIOM5227X270N_S1M(Primary) 31.315,11.968 r90 top (schematic designator D4)
D4_Ch2 "SM330A" *DIOM5227X270N_S1M(Primary) 710.396,140.841 r90 top (schematic designator D4)
D4_Ch3 "SM330A" *DIOM5227X270N_S1M(Primary) 722.51,173.341 r90 top (schematic designator D4)
D4_Ch4 "SM330A" *DIOM5227X270N_S1M(Primary) 736.21,205.041 r90 top (schematic designator D4)
D4_Ch5 "SM330A" *DIOM5227X270N_S1M(Primary) 740.713,237.026 r90 top (schematic designator D4)
D4_Ch6 "SM330A" *DIOM5227X270N_S1M(Primary) 747.31,271.741 r90 top (schematic designator D4)
D4_Ch7 "SM330A" *DIOM5227X270N_S1M(Primary) 716.51,306.041 r90 top (schematic designator D4)
D4_Ch8 "SM330A" *DIOM5227X270N_S1M(Primary) 650.496,333.341 r90 top (schematic designator D4)
D4_Ch9 "SM330A" *DIOM5227X270N_S1M(Primary) 765.831,364.874 r90 top (schematic designator D4)
D4_Ch10 "SM330A" *DIOM5227X270N_S1M(Primary) 720.115,395.94 r90 top (schematic designator D4)
D5_Ch1 "SM330A" *DIOM5227X270N_S1M(Primary) 403.163,-27.432 r90 top (schematic designator D5)
D5_Ch2 "SM330A" *DIOM5227X270N_S1M(Primary) 739.86,140.841 r90 top (schematic designator D5)
D5_Ch3 "SM330A" *DIOM5227X270N_S1M(Primary) 751.974,173.341 r90 top (schematic designator D5)
D5_Ch4 "SM330A" *DIOM5227X270N_S1M(Primary) 765.674,205.041 r90 top (schematic designator D5)
D5_Ch5 "SM330A" *DIOM5227X270N_S1M(Primary) 770.177,237.026 r90 top (schematic designator D5)
D5_Ch6 "SM330A" *DIOM5227X270N_S1M(Primary) 776.774,271.741 r90 top (schematic designator D5)
D5_Ch7 "SM330A" *DIOM5227X270N_S1M(Primary) 745.974,306.041 r90 top (schematic designator D5)
D5_Ch8 "SM330A" *DIOM5227X270N_S1M(Primary) 679.96,333.341 r90 top (schematic designator D5)
D5_Ch9 "SM330A" *DIOM5227X270N_S1M(Primary) 795.295,364.874 r90 top (schematic designator D5)
D5_Ch10 "SM330A" *DIOM5227X270N_S1M(Primary) 752.119,395.94 r90 top (schematic designator D5)
D6_Ch1 "SM330A" *DIOM5227X270N_S1M(Primary) 126.049,-27.432 r90 top (schematic designator D6)
D6_Ch2 "SM330A" *DIOM5227X270N_S1M(Primary) 450.935,140.841 r90 top (schematic designator D6)
D6_Ch3 "SM330A" *DIOM5227X270N_S1M(Primary) 463.049,173.341 r90 top (schematic designator D6)
D6_Ch4 "SM330A" *DIOM5227X270N_S1M(Primary) 476.749,205.041 r90 top (schematic designator D6)
D6_Ch5 "SM330A" *DIOM5227X270N_S1M(Primary) 481.252,237.026 r90 top (schematic designator D6)
D6_Ch6 "SM330A" *DIOM5227X270N_S1M(Primary) 487.849,271.741 r90 top (schematic designator D6)
D6_Ch7 "SM330A" *DIOM5227X270N_S1M(Primary) 457.049,306.041 r90 top (schematic designator D6)
D6_Ch8 "SM330A" *DIOM5227X270N_S1M(Primary) 391.035,333.341 r90 top (schematic designator D6)
D6_Ch9 "SM330A" *DIOM5227X270N_S1M(Primary) 506.37,364.874 r90 top (schematic designator D6)
D6_Ch10 "SM330A" *DIOM5227X270N_S1M(Primary) 433.984,395.94 r90 top (schematic designator D6)
D7_Ch1 "SM330A" *DIOM5227X270N_S1M(Primary) 413.069,-27.432 r90 top (schematic designator D7)
D7_Ch2 "SM330A" *DIOM5227X270N_S1M(Primary) 750.274,140.841 r90 top (schematic designator D7)
D7_Ch3 "SM330A" *DIOM5227X270N_S1M(Primary) 762.388,173.341 r90 top (schematic designator D7)
D7_Ch4 "SM330A" *DIOM5227X270N_S1M(Primary) 776.088,205.041 r90 top (schematic designator D7)
D7_Ch5 "SM330A" *DIOM5227X270N_S1M(Primary) 780.591,237.026 r90 top (schematic designator D7)
D7_Ch6 "SM330A" *DIOM5227X270N_S1M(Primary) 787.188,271.741 r90 top (schematic designator D7)
D7_Ch7 "SM330A" *DIOM5227X270N_S1M(Primary) 756.388,306.041 r90 top (schematic designator D7)
D7_Ch8 "SM330A" *DIOM5227X270N_S1M(Primary) 690.374,333.341 r90 top (schematic designator D7)
D7_Ch9 "SM330A" *DIOM5227X270N_S1M(Primary) 805.709,364.874 r90 top (schematic designator D7)
D7_Ch10 "SM330A" *DIOM5227X270N_S1M(Primary) 763.803,395.94 r90 top (schematic designator D7)
D8_Ch1 "SM330A" *DIOM5227X270N_S1M(Primary) 135.955,-27.432 r90 top (schematic designator D8)
D8_Ch2 "SM330A" *DIOM5227X270N_S1M(Primary) 461.476,140.841 r90 top (schematic designator D8)
D8_Ch3 "SM330A" *DIOM5227X270N_S1M(Primary) 473.59,173.341 r90 top (schematic designator D8)
D8_Ch4 "SM330A" *DIOM5227X270N_S1M(Primary) 487.29,205.041 r90 top (schematic designator D8)
D8_Ch5 "SM330A" *DIOM5227X270N_S1M(Primary) 491.793,237.026 r90 top (schematic designator D8)
D8_Ch6 "SM330A" *DIOM5227X270N_S1M(Primary) 498.39,271.741 r90 top (schematic designator D8)
D8_Ch7 "SM330A" *DIOM5227X270N_S1M(Primary) 467.59,306.041 r90 top (schematic designator D8)
D8_Ch8 "SM330A" *DIOM5227X270N_S1M(Primary) 401.576,333.341 r90 top (schematic designator D8)
D8_Ch9 "SM330A" *DIOM5227X270N_S1M(Primary) 516.911,364.874 r90 top (schematic designator D8)
D8_Ch10 "SM330A" *DIOM5227X270N_S1M(Primary) 445.795,395.94 r90 top (schematic designator D8)
D9 "S1M" *DIOM5227X270N_S1M(Primary) 321.096,8.636 r90 top
D10 "S1M" *DIOM5227X270N_S1M(Primary) 317.286,35.814 r90 top
D11_HCFetG1 "SM330A" *DIOM5227X270N_S1M(Primary) 1179.944,1181.595 r0 top (schematic designator D11)
D11_HCFetG2 "SM330A" *DIOM5227X270N_S1M(Primary) 155.448,403.987 r90 top (schematic designator D11)
D11_HCFetG3 "SM330A" *DIOM5227X270N_S1M(Primary) 1201.915,1181.595 r0 top (schematic designator D11)
D11_HCFetG4 "SM330A" *DIOM5227X270N_S1M(Primary) 1176.896,1155.052 r0 top (schematic designator D11)
D11_HCFetG5 "SM330A" *DIOM5227X270N_S1M(Primary) 1204.709,1156.068 r0 top (schematic designator D11)
D11_HCFetG6 "SM330A" *DIOM5227X270N_S1M(Primary) 1176.896,1134.732 r0 top (schematic designator D11)
D11_HCFetG7 "SM330A" *DIOM5227X270N_S1M(Primary) 1205.344,1136.129 r0 top (schematic designator D11)
D11_HCFetG8 "SM330A" *DIOM5227X270N_S1M(Primary) 1174.356,1112.761 r0 top (schematic designator D11)
D11_HCFetG9 "SM330A" *DIOM5227X270N_S1M(Primary) 1204.709,1111.11 r0 top (schematic designator D11)
D11_HCFetG10 "SM330A" *DIOM5227X270N_S1M(Primary) 1174.864,1093.965 r0 top (schematic designator D11)
D12_HCFetV1 "SM330A" *DIOM5227X270N_S1M(Primary) 1207.503,1093.076 r0 top (schematic designator D12)
D12_HCFetV2 "SM330A" *DIOM5227X270N_S1M(Primary) 1288.656,1243.063 r0 top (schematic designator D12)
D12_HCFetV3 "SM330A" *DIOM5227X270N_S1M(Primary) 1315.326,1243.444 r0 top (schematic designator D12)
D12_HCFetV4 "SM330A" *DIOM5227X270N_S1M(Primary) 1287.589,1221.74 r0 top (schematic designator D12)
D12_HCFetV5 "SM330A" *DIOM5227X270N_S1M(Primary) 1318.577,1223.01 r0 top (schematic designator D12)
D12_HCFetV6 "SM330A" *DIOM5227X270N_S1M(Primary) 1287.081,1198.118 r0 top (schematic designator D12)
D12_HCFetV7 "SM330A" *DIOM5227X270N_S1M(Primary) 155.448,415.925 r90 top (schematic designator D12)
D12_HCFetV8 "SM330A" *DIOM5227X270N_S1M(Primary) 1317.866,1201.661 r0 top (schematic designator D12)
D12_HCFetV9 "SM330A" *DIOM5227X270N_S1M(Primary) 1287.589,1178.687 r0 top (schematic designator D12)
D12_HCFetV10 "SM330A" *DIOM5227X270N_S1M(Primary) 1321.168,1178.674 r0 top (schematic designator D12)
D13_MotFet1 "S1M" *DIOM5227X270N_S1M(Primary) 1290.307,1152.512 r0 top (schematic designator D13)
D13_MotFet2 "S1M" *DIOM5227X270N_S1M(Primary) 1324.165,1155.573 r0 top (schematic designator D13)
D13_MotFet3 "S1M" *DIOM5227X270N_S1M(Primary) 1292.161,1134.364 r0 top (schematic designator D13)
D13_MotFet4 "S1M" *DIOM5227X270N_S1M(Primary) 1326.451,1130.554 r0 top (schematic designator D13)
D13_MotFet5 "S1M" *DIOM5227X270N_S1M(Primary) 189.992,439.166 r90 top (schematic designator D13)
D13_MotFet6 "S1M" *DIOM5227X270N_S1M(Primary) 1291.831,1113.015 r0 top (schematic designator D13)
D13_MotFet7 "S1M" *DIOM5227X270N_S1M(Primary) 1327.899,1112.126 r0 top (schematic designator D13)
D14_SenIn1 "SM120A" *DIOM5227X270N_S1M(Primary) 1233.665,1155.433 r0 top (schematic designator D14)
D14_SenIn2 "SM120A" *DIOM5227X270N_S1M(Primary) 1253.731,1155.052 r0 top (schematic designator D14)
D14_SenIn3 "SM120A" *DIOM5227X270N_S1M(Primary) 203.454,451.104 r90 top (schematic designator D14)
D14_SenIn4 "SM120A" *DIOM5227X270N_S1M(Primary) 1233.919,1140.955 r0 top (schematic designator D14)
D14_SenIn5 "SM120A" *DIOM5227X270N_S1M(Primary) 1256.144,1140.32 r0 top (schematic designator D14)
D14_SenIn6 "SM120A" *DIOM5227X270N_S1M(Primary) 1234.554,1129.779 r0 top (schematic designator D14)
D14_SenIn7 "SM120A" *DIOM5227X270N_S1M(Primary) 1258.557,1129.779 r0 top (schematic designator D14)
D14_SenIn8 "SM120A" *DIOM5227X270N_S1M(Primary) 1233.411,1117.079 r0 top (schematic designator D14)
D14_SenIn9 "SM120A" *DIOM5227X270N_S1M(Primary) 1257.795,1118.984 r0 top (schematic designator D14)
D14_SenIn10 "SM120A" *DIOM5227X270N_S1M(Primary) 1233.157,1102.728 r0 top (schematic designator D14)
D15_SenIn1 "SM120A" *DIOM5227X270N_S1M(Primary) 1233.665,1155.433 r0 top (schematic designator D15)
D15_SenIn2 "SM120A" *DIOM5227X270N_S1M(Primary) 1253.731,1155.052 r0 top (schematic designator D15)
D15_SenIn3 "SM120A" *DIOM5227X270N_S1M(Primary) 187.452,451.104 r90 top (schematic designator D15)
D15_SenIn4 "SM120A" *DIOM5227X270N_S1M(Primary) 1233.919,1140.955 r0 top (schematic designator D15)
D15_SenIn5 "SM120A" *DIOM5227X270N_S1M(Primary) 1256.144,1140.32 r0 top (schematic designator D15)
D15_SenIn6 "SM120A" *DIOM5227X270N_S1M(Primary) 1234.554,1129.779 r0 top (schematic designator D15)
D15_SenIn7 "SM120A" *DIOM5227X270N_S1M(Primary) 1258.557,1129.779 r0 top (schematic designator D15)
D15_SenIn8 "SM120A" *DIOM5227X270N_S1M(Primary) 1233.411,1117.079 r0 top (schematic designator D15)
D15_SenIn9 "SM120A" *DIOM5227X270N_S1M(Primary) 1257.795,1118.984 r0 top (schematic designator D15)
D15_SenIn10 "SM120A" *DIOM5227X270N_S1M(Primary) 1233.157,1102.728 r0 top (schematic designator D15)
D16_SenIn1 "SM120A" *DIOM5227X270N_S1M(Primary) 1233.665,1155.433 r0 top (schematic designator D16)
D16_SenIn2 "SM120A" *DIOM5227X270N_S1M(Primary) 1253.731,1155.052 r0 top (schematic designator D16)
D16_SenIn3 "SM120A" *DIOM5227X270N_S1M(Primary) 171.45,451.104 r90 top (schematic designator D16)
D16_SenIn4 "SM120A" *DIOM5227X270N_S1M(Primary) 1233.919,1140.955 r0 top (schematic designator D16)
D16_SenIn5 "SM120A" *DIOM5227X270N_S1M(Primary) 1256.144,1140.32 r0 top (schematic designator D16)
D16_SenIn6 "SM120A" *DIOM5227X270N_S1M(Primary) 1234.554,1129.779 r0 top (schematic designator D16)
D16_SenIn7 "SM120A" *DIOM5227X270N_S1M(Primary) 1258.557,1129.779 r0 top (schematic designator D16)
D16_SenIn8 "SM120A" *DIOM5227X270N_S1M(Primary) 1233.411,1117.079 r0 top (schematic designator D16)
D16_SenIn9 "SM120A" *DIOM5227X270N_S1M(Primary) 1257.795,1118.984 r0 top (schematic designator D16)
D16_SenIn10 "SM120A" *DIOM5227X270N_S1M(Primary) 1233.157,1102.728 r0 top (schematic designator D16)
D17_SenIn1 "SM120A" *DIOM5227X270N_S1M(Primary) 1233.665,1155.433 r0 top (schematic designator D17)
D17_SenIn2 "SM120A" *DIOM5227X270N_S1M(Primary) 1253.731,1155.052 r0 top (schematic designator D17)
D17_SenIn3 "SM120A" *DIOM5227X270N_S1M(Primary) 155.448,451.104 r90 top (schematic designator D17)
D17_SenIn4 "SM120A" *DIOM5227X270N_S1M(Primary) 1233.919,1140.955 r0 top (schematic designator D17)
D17_SenIn5 "SM120A" *DIOM5227X270N_S1M(Primary) 1256.144,1140.32 r0 top (schematic designator D17)
D17_SenIn6 "SM120A" *DIOM5227X270N_S1M(Primary) 1234.554,1129.779 r0 top (schematic designator D17)
D17_SenIn7 "SM120A" *DIOM5227X270N_S1M(Primary) 1258.557,1129.779 r0 top (schematic designator D17)
D17_SenIn8 "SM120A" *DIOM5227X270N_S1M(Primary) 1233.411,1117.079 r0 top (schematic designator D17)
D17_SenIn9 "SM120A" *DIOM5227X270N_S1M(Primary) 1257.795,1118.984 r0 top (schematic designator D17)
D17_SenIn10 "SM120A" *DIOM5227X270N_S1M(Primary) 1233.157,1102.728 r0 top (schematic designator D17)
JAnd_Ch1 "Header 3" HDR1X3 76.2,31.7 r90 top (schematic designator JAnd)
JAnd_Ch2 "Header 3" HDR1X3 543.137,138.047 r90 top (schematic designator JAnd)
JAnd_Ch3 "Header 3" HDR1X3 555.251,170.547 r90 top (schematic designator JAnd)
JAnd_Ch4 "Header 3" HDR1X3 568.951,202.247 r90 top (schematic designator JAnd)
JAnd_Ch5 "Header 3" HDR1X3 573.454,234.232 r90 top (schematic designator JAnd)
JAnd_Ch6 "Header 3" HDR1X3 580.051,268.947 r90 top (schematic designator JAnd)
JAnd_Ch7 "Header 3" HDR1X3 549.251,303.247 r90 top (schematic designator JAnd)
JAnd_Ch8 "Header 3" HDR1X3 483.237,330.547 r90 top (schematic designator JAnd)
JAnd_Ch9 "Header 3" HDR1X3 598.572,362.08 r90 top (schematic designator JAnd)
JAnd_Ch10 "Header 3" HDR1X3 533.806,393.146 r90 top (schematic designator JAnd)
JIP_Ch1 "Header 3" HDR1X3 467.044,-30.226 r90 top (schematic designator JIP)
JIP_Ch2 "Header 3" HDR1X3 806.281,138.047 r90 top (schematic designator JIP)
JIP_Ch3 "Header 3" HDR1X3 818.395,170.547 r90 top (schematic designator JIP)
JIP_Ch4 "Header 3" HDR1X3 832.095,202.247 r90 top (schematic designator JIP)
JIP_Ch5 "Header 3" HDR1X3 836.598,234.232 r90 top (schematic designator JIP)
JIP_Ch6 "Header 3" HDR1X3 843.195,268.947 r90 top (schematic designator JIP)
JIP_Ch7 "Header 3" HDR1X3 812.395,303.247 r90 top (schematic designator JIP)
JIP_Ch8 "Header 3" HDR1X3 746.381,330.547 r90 top (schematic designator JIP)
JIP_Ch9 "Header 3" HDR1X3 861.716,362.08 r90 top (schematic designator JIP)
JIP_Ch10 "Header 3" HDR1X3 824.89,393.146 r90 top (schematic designator JIP)
JTC_Ch1 "Header 3" HDR1X3 517.844,-30.226 r90 top (schematic designator JTC)
JTC_Ch2 "Header 3" HDR1X3 859.621,138.047 r90 top (schematic designator JTC)
JTC_Ch3 "Header 3" HDR1X3 871.735,170.547 r90 top (schematic designator JTC)
JTC_Ch4 "Header 3" HDR1X3 885.435,202.247 r90 top (schematic designator JTC)
JTC_Ch5 "Header 3" HDR1X3 889.938,234.232 r90 top (schematic designator JTC)
JTC_Ch6 "Header 3" HDR1X3 896.535,268.947 r90 top (schematic designator JTC)
JTC_Ch7 "Header 3" HDR1X3 865.735,303.247 r90 top (schematic designator JTC)
JTC_Ch8 "Header 3" HDR1X3 799.721,330.547 r90 top (schematic designator JTC)
JTC_Ch9 "Header 3" HDR1X3 915.056,362.08 r90 top (schematic designator JTC)
JTC_Ch10 "Header 3" HDR1X3 884.58,393.146 r90 top (schematic designator JTC)
JUSB_Ch1 "Header 3" HDR1X3 228.03,-30.226 r90 top (schematic designator JUSB)
JUSB_Ch2 "Header 3" HDR1X3 556.599,138.047 r90 top (schematic designator JUSB)
JUSB_Ch3 "Header 3" HDR1X3 568.713,170.547 r90 top (schematic designator JUSB)
JUSB_Ch4 "Header 3" HDR1X3 582.413,202.247 r90 top (schematic designator JUSB)
JUSB_Ch5 "Header 3" HDR1X3 586.916,234.232 r90 top (schematic designator JUSB)
JUSB_Ch6 "Header 3" HDR1X3 593.513,268.947 r90 top (schematic designator JUSB)
JUSB_Ch7 "Header 3" HDR1X3 562.713,303.247 r90 top (schematic designator JUSB)
JUSB_Ch8 "Header 3" HDR1X3 496.699,330.547 r90 top (schematic designator JUSB)
JUSB_Ch9 "Header 3" HDR1X3 612.034,362.08 r90 top (schematic designator JUSB)
JUSB_Ch10 "Header 3" HDR1X3 548.538,393.146 r90 top (schematic designator JUSB)
L1 "15uH" IND_SMD-13.0mm 299.633,4.572 r90 top
L2 "15uH" IND_SMD-13.0mm 295.823,31.75 r90 top
LM1 "LM2596-ADJ" T05A 289.727,6.858 r90 top
LM2 "LM2596-ADJ" T05A 285.917,34.036 r90 top
optSupAnd_Ch1 "Header 2" HDR1X2 84.316,59.727 r90 top (schematic designator optSupAnd)
optSupAnd_Ch2 "Header 2" HDR1X2 471.509,140.333 r90 top (schematic designator optSupAnd)
optSupAnd_Ch3 "Header 2" HDR1X2 483.623,172.833 r90 top (schematic designator optSupAnd)
optSupAnd_Ch4 "Header 2" HDR1X2 497.323,204.533 r90 top (schematic designator optSupAnd)
optSupAnd_Ch5 "Header 2" HDR1X2 501.826,236.518 r90 top (schematic designator optSupAnd)
optSupAnd_Ch6 "Header 2" HDR1X2 508.423,271.233 r90 top (schematic designator optSupAnd)
optSupAnd_Ch7 "Header 2" HDR1X2 477.623,305.533 r90 top (schematic designator optSupAnd)
optSupAnd_Ch8 "Header 2" HDR1X2 411.609,332.833 r90 top (schematic designator optSupAnd)
optSupAnd_Ch9 "Header 2" HDR1X2 526.944,364.366 r90 top (schematic designator optSupAnd)
optSupAnd_Ch10 "Header 2" HDR1X2 457.098,395.432 r90 top (schematic designator optSupAnd)
optSupIP_Ch1 "Header 2" HDR1X2 384.24,-27.94 r90 top (schematic designator optSupIP)
optSupIP_Ch2 "Header 2" HDR1X2 720.429,140.333 r90 top (schematic designator optSupIP)
optSupIP_Ch3 "Header 2" HDR1X2 732.543,172.833 r90 top (schematic designator optSupIP)
optSupIP_Ch4 "Header 2" HDR1X2 746.243,204.533 r90 top (schematic designator optSupIP)
optSupIP_Ch5 "Header 2" HDR1X2 750.746,236.518 r90 top (schematic designator optSupIP)
optSupIP_Ch6 "Header 2" HDR1X2 757.343,271.233 r90 top (schematic designator optSupIP)
optSupIP_Ch7 "Header 2" HDR1X2 726.543,305.533 r90 top (schematic designator optSupIP)
optSupIP_Ch8 "Header 2" HDR1X2 660.529,332.833 r90 top (schematic designator optSupIP)
optSupIP_Ch9 "Header 2" HDR1X2 775.864,364.366 r90 top (schematic designator optSupIP)
optSupIP_Ch10 "Header 2" HDR1X2 731.418,395.432 r90 top (schematic designator optSupIP)
optSupTC_Ch1 "Header 2" HDR1X2 422.594,-27.94 r90 top (schematic designator optSupTC)
optSupTC_Ch2 "Header 2" HDR1X2 760.307,140.333 r90 top (schematic designator optSupTC)
optSupTC_Ch3 "Header 2" HDR1X2 772.421,172.833 r90 top (schematic designator optSupTC)
optSupTC_Ch4 "Header 2" HDR1X2 786.121,204.533 r90 top (schematic designator optSupTC)
optSupTC_Ch5 "Header 2" HDR1X2 790.624,236.518 r90 top (schematic designator optSupTC)
optSupTC_Ch6 "Header 2" HDR1X2 797.221,271.233 r90 top (schematic designator optSupTC)
optSupTC_Ch7 "Header 2" HDR1X2 766.421,305.533 r90 top (schematic designator optSupTC)
optSupTC_Ch8 "Header 2" HDR1X2 700.407,332.833 r90 top (schematic designator optSupTC)
optSupTC_Ch9 "Header 2" HDR1X2 815.742,364.366 r90 top (schematic designator optSupTC)
optSupTC_Ch10 "Header 2" HDR1X2 775.106,395.432 r90 top (schematic designator optSupTC)
optSupUSB_Ch1 "Header 2" HDR1X2 165.8,-27.94 r90 top (schematic designator optSupUSB)
optSupUSB_Ch2 "Header 2" HDR1X2 492.337,140.333 r90 top (schematic designator optSupUSB)
optSupUSB_Ch3 "Header 2" HDR1X2 504.451,172.833 r90 top (schematic designator optSupUSB)
optSupUSB_Ch4 "Header 2" HDR1X2 518.151,204.533 r90 top (schematic designator optSupUSB)
optSupUSB_Ch5 "Header 2" HDR1X2 522.654,236.518 r90 top (schematic designator optSupUSB)
optSupUSB_Ch6 "Header 2" HDR1X2 529.251,271.233 r90 top (schematic designator optSupUSB)
optSupUSB_Ch7 "Header 2" HDR1X2 498.451,305.533 r90 top (schematic designator optSupUSB)
optSupUSB_Ch8 "Header 2" HDR1X2 432.437,332.833 r90 top (schematic designator optSupUSB)
optSupUSB_Ch9 "Header 2" HDR1X2 547.772,364.366 r90 top (schematic designator optSupUSB)
optSupUSB_Ch10 "Header 2" HDR1X2 479.196,395.432 r90 top (schematic designator optSupUSB)
P1 "Header 20X2" HDR2X20 30,75 r270 top locked
P2 "Header 20X2" HDR2X20 30,140 r270 top locked
P3 "Header 20X2" HDR2X20 30,205 r270 top locked
P4 "Header 20X2" HDR2X20 30,270 r270 top locked
P5 "Header 20X2" HDR2X20 30,335 r270 top locked
P6 "Header 20X2" HDR2X20 160,75 r270 top locked
P7 "Header 20X2" HDR2X20 160,140 r270 top locked
P8 "Header 20X2" HDR2X20 160,205 r270 top locked